# Altium PCB 3043-1-1532.PcbDoc (part 2 of 2)
Units mm, origin at the board's own origin, x right, y up, seen from the top; angles counter-clockwise.
Board outline 86 x 85.71 mm, 4 copper layers (Top Layer, Mid-Layer 1, Mid-Layer 2, Bottom Layer); 181 components, 109 nets, 536 pads, 310 vias.
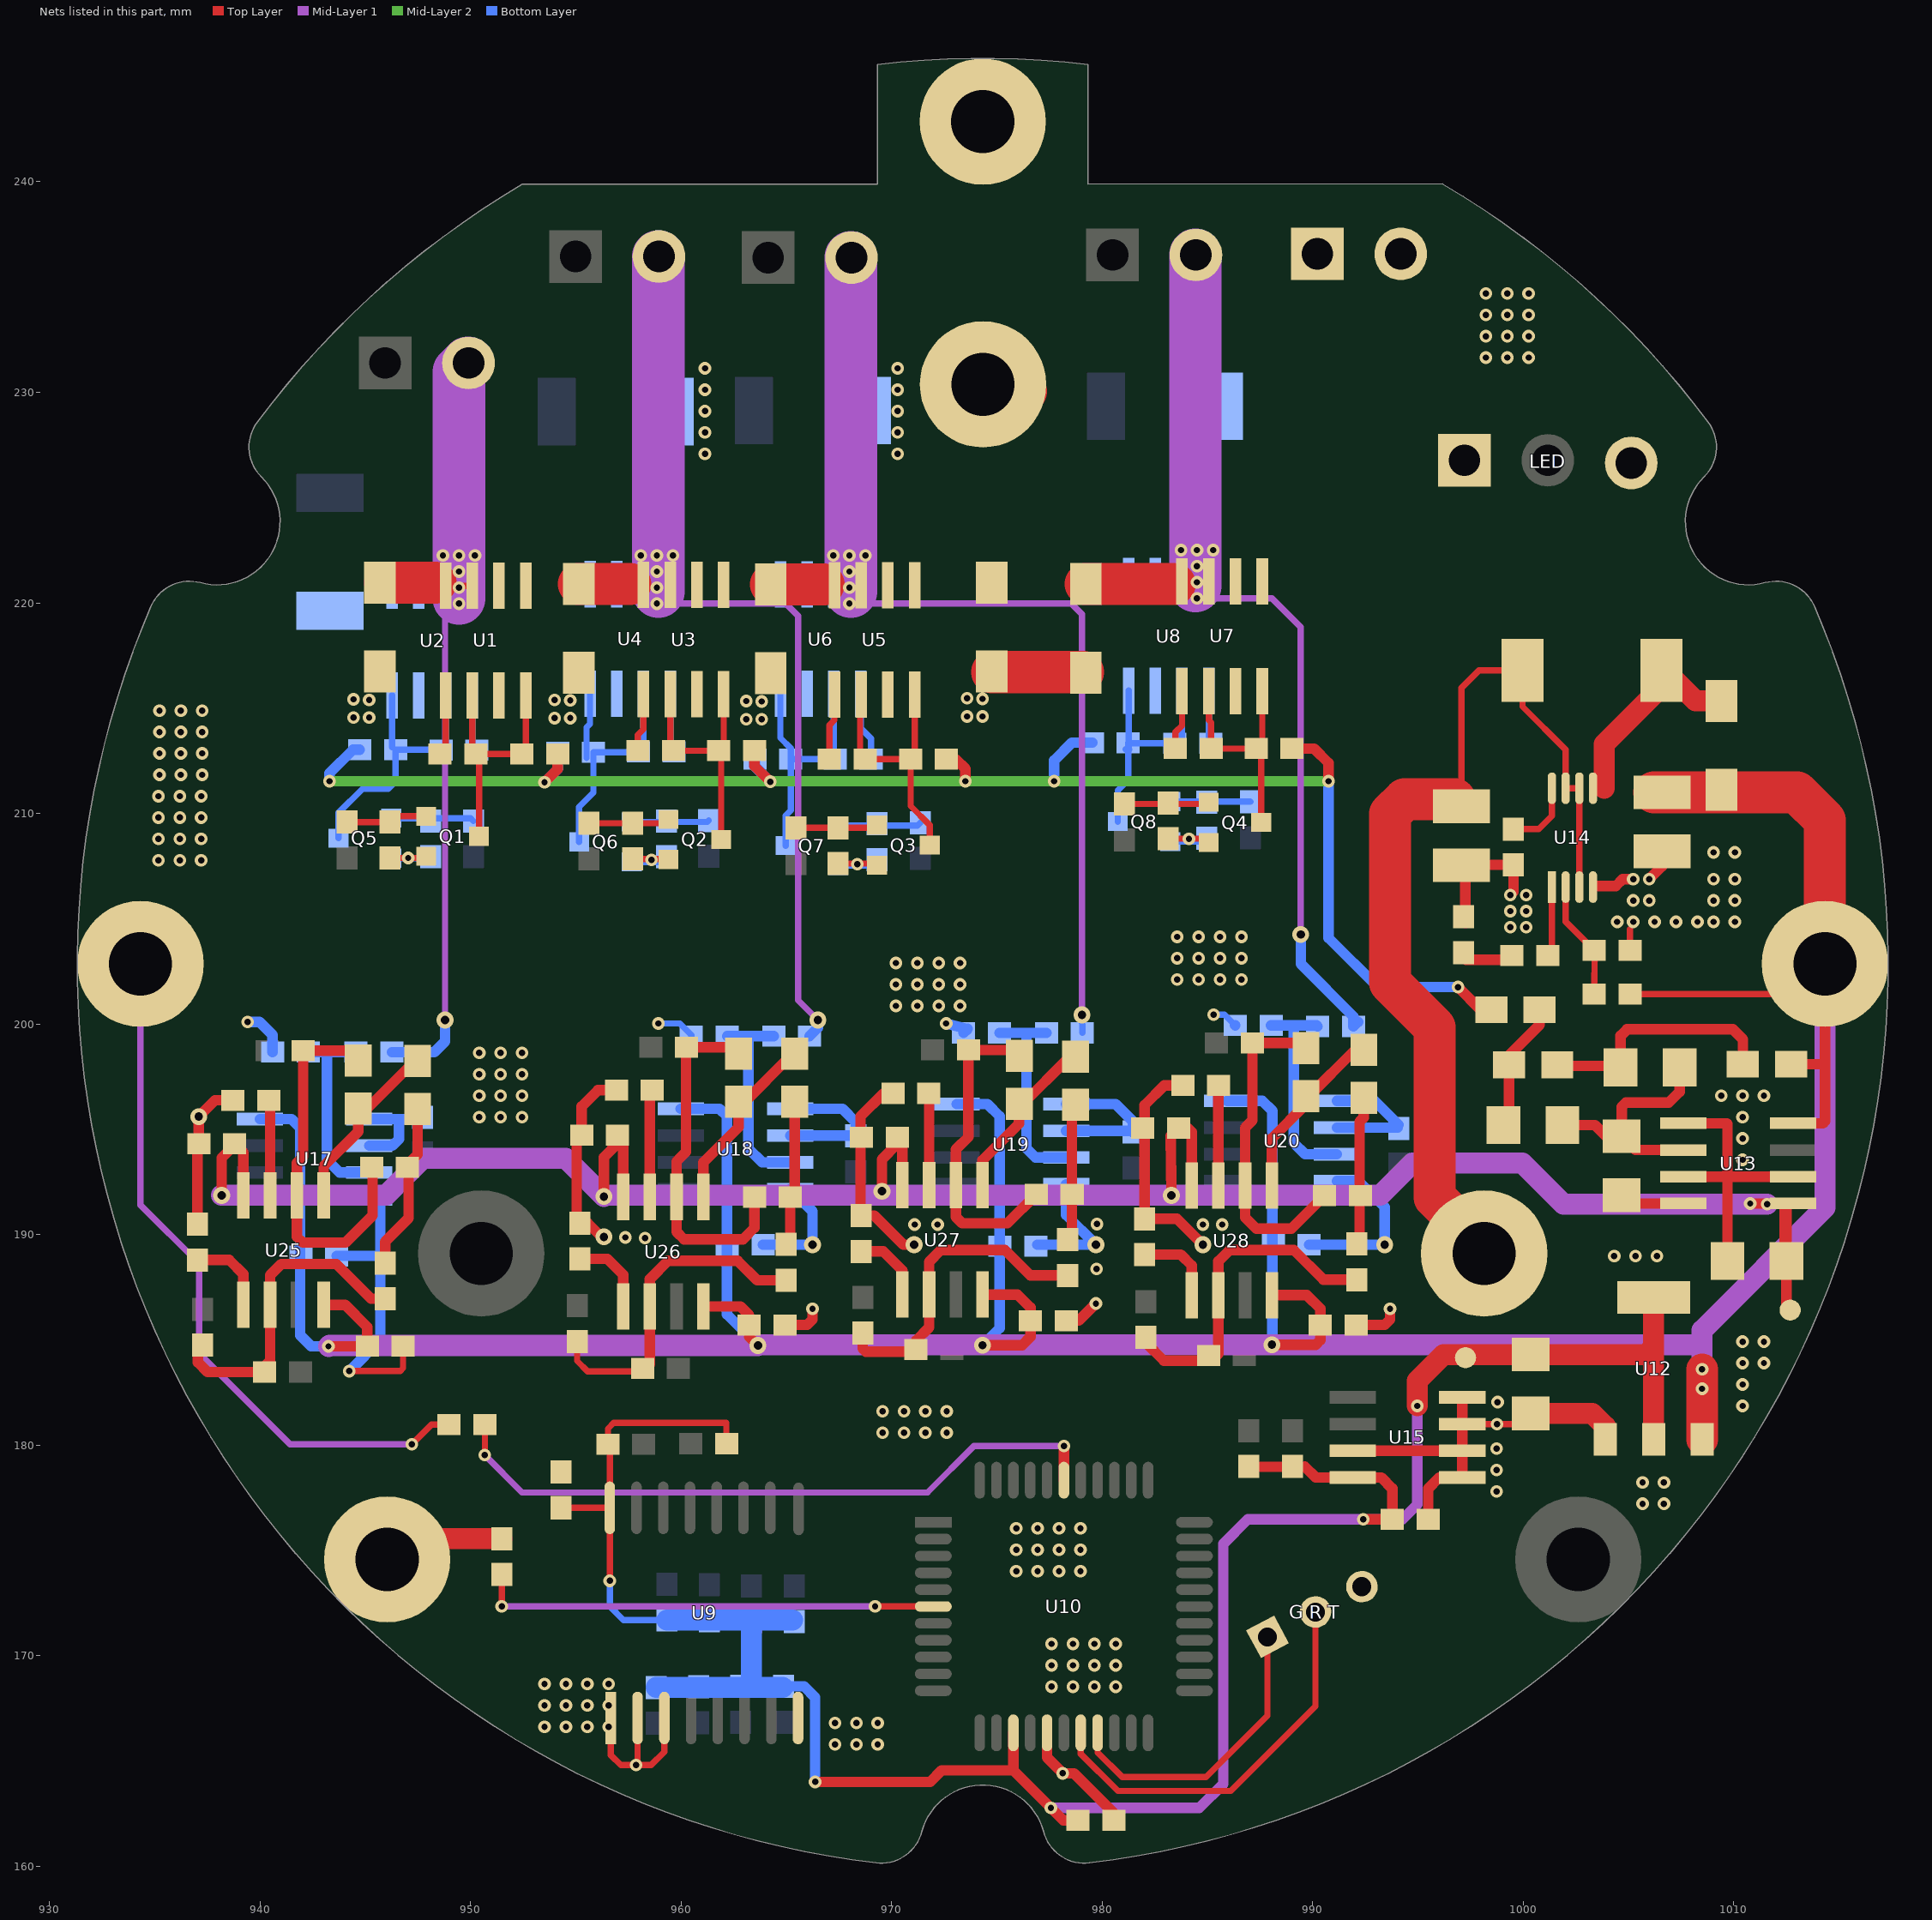
[diagram p4: the nets of this part, all layers, seen from the top]

## Via types
v1: diameter 0.6, hole 0.3, Top Layer to Bottom Layer, 288 vias
v2: diameter 0.8, hole 0.4, Top Layer to Bottom Layer, 22 vias

## Nets (pads, with @x,y where several pads share a name; then routed paths per layer and width w, separated by ;. In a path a pad name is that pad's centre, name@x,y a point inside that pad or via, vN(x,y) a via of type N, cw(c..) or ccw(c..) an arc to the next point about the centre after c; other vN are vias at no path point) (continued)
GND: "G R T.3" +SOLAR-.1 C1.2 C2.2 C4.2 C5.2 C6.2 C7.2 C9.2 C10.2 C11.2 C12.2 C13.2 C14.2 C15.2 C16.2 C17.2 C18.2 C19.2 C20.2 C21.2 C22.2 GND.1 LED.3 Q1.2 Q2.2 Q3.2 Q4.2 Q5.2 Q6.2 Q7.2 Q8.2 R3.2 R4.2 R5.2 R6.2 R15.2 R28.1 R29.1 R34.1 R35.1 R37.2 R49.2 R50.2 R51.2 R52.2 R63.2 R64.2 R65.2 R66.2 R78.2 R87.2 R88.2 R89.2 R90.2 R91.2 R92.2 R93.2 U9.1 U9.2 U9.3 U9.8 U10.16 U12.1 U13.1 U13.3 U13.6 U14.4 U15.1 U15.2 U15.3 U15.4 U15.7 U17.4 U18.4 U19.4 U20.4 | length 157.5
  Top Layer w0.3: v1(944.245,183.515) 946.658,183.515 946.797,183.654 C10.2@946.797,184.709 ; R78.2@946.175,207.887 Q1.2@947.819,207.887 ; U9.1@956.666,167.04 956.666,165.278 957.139,164.805 958.58,164.805 959.206,165.43 U9.3@959.206,167.04 ; R87.2@957.707,207.836 Q2.2@959.38,207.836 ; v1@957.936,164.805 U9.2@957.936,167.04 ; R88.2@967.461,207.62 Q3.2@969.235,207.62 ; R89.2@983.132,208.802 984.881,208.802 Q4.2@985.057,208.625 ; U15.3@997.102,181 999.852,181 C2.2@1000.354,181.502 ; R15.2@1005.064,203.505 1005.064,204.507
  Top Layer w0.5: R51.2@937.031,190.493 C12.2@937.031,194.012 ; C12.2@937.096,194.32 v2(937.096,195.603) 937.87,196.377 R49.2@938.721,196.377 ; v2(956.335,189.89) 956.335,189.773 955.562,190.547 955.04,190.547 955.04,194.484 C13.2@955.282,194.726 955.282,196.086 956.056,196.86 R50.2@956.933,196.86 ; C11.2@964.932,185.709 965.987,185.709 966.241,185.963 v1(966.241,186.471) ; R65.2@968.527,190.789 968.527,195.615 969.62,196.707 R63.2@970.065,196.707 ; R65.2@968.553,190.902 969.176,190.902 970.559,189.519 v2(971.067,189.519) ; U10.16@977.382,166.336 977.382,165.161 v1(978.129,164.414) 978.662,164.414 980.553,162.523 C18.2@980.553,162.179 ; C15.2@978.293,185.912 978.891,185.912 v1(979.703,186.725) ; R64.2@983.832,197.088 982.955,197.088 982.015,196.148 R66.2@982.015,190.75 983.552,190.75 v2(984.783,189.519) ; U15.7@991.902,179.73 U15.2@997.102,179.73 ; C14.2@992.06,185.709 993.419,185.709 993.673,185.963 v1(993.673,186.471) ; C9.2@995.479,176.479 995.479,177.939 996.001,178.46 U15.1@997.102,178.46 U15.4@997.102,182.27 ; C5.2@997.084,207.557 C7.2@999.531,207.557 v1@999.531,206.273 ; R37.2@997.245,204.787 C5.2@997.245,207.363 ; U14.4@1003.503,206.553 1004.392,206.553 1004.722,206.883 v1(1005.221,206.883) ; v1(1005.983,206.883) 1006.592,207.493 C6.2@1006.592,208.201 ; U13.3@1007.609,192.745 U13.6@1012.809,192.745 ; U13.1@1007.609,195.285 1009.666,195.285 1009.695,195.256 C4.2@1009.695,188.747
  Top Layer w1: C2.2@1000.354,181.381 C2.2@1000.354,181.502 1003.281,181.502 1003.892,180.891 U12.1@1003.892,180.267
  Bottom Layer w0.3: Q5.2@946.232,207.876 948.044,207.876 R90.2@948.106,207.938 ; Q6.2@957.662,207.698 959.068,207.698 R91.2@959.307,207.938 ; v1(958.926,200.025) 959.942,200.025 960.489,199.478 R29.1@960.489,199.425 ; Q7.2@967.466,207.521 969.024,207.521 R92.2@969.315,207.811 ; Q8.2@983.239,208.664 984.798,208.664 R93.2@984.961,208.827 ; v1(985.291,200.441) 985.813,200.441 R35.1@986.321,199.933
  Bottom Layer w0.5: v1(939.419,200.101) 939.978,200.101 940.601,199.478 R28.1@940.601,198.663 ; C19.2@943.647,188.986 945.718,188.986 ; v1(944.245,183.515) 945.718,184.988 U17.4@945.718,191.689 ; C20.2@963.891,189.519 v2(966.241,189.519) 966.241,191.103 U18.4@965.184,192.161 ; v1(972.591,200.025) 973.607,199.767 R34.1@973.418,199.577 ; C21.2@976.921,189.519 v2(979.703,189.519) 978.29,190.932 U19.4@978.29,192.389 ; R35.1@986.307,199.947 R35.1@986.321,199.933 ; C22.2@989.824,189.519 v2(993.419,189.519) 993.419,191.297 992.175,192.542 U20.4@991.143,192.542
  other v1: 957.859,164.805 967.308,165.786 968.324,165.786 969.34,165.786 953.516,166.624 954.532,166.624 955.548,166.624 956.564,166.624 967.308,166.802 968.324,166.802 969.34,166.802 953.516,167.64 954.532,167.64 955.548,167.64 956.564,167.64 977.595,168.529 978.611,168.529 979.627,168.529 980.643,168.529 953.516,168.656 954.532,168.656 955.548,168.656 956.564,168.656 977.595,169.545 978.611,169.545 979.627,169.545 980.643,169.545 977.595,170.561 978.611,170.561 979.627,170.561 980.643,170.561 975.919,174.015 976.935,174.015 977.951,174.015 978.967,174.015 975.919,175.031 976.935,175.031 977.951,175.031 978.967,175.031 975.919,176.047 976.935,176.047 977.951,176.047 978.967,176.047 1005.662,177.216 1006.678,177.216 998.728,177.8 1005.662,178.232 1006.678,178.232 998.728,178.816 998.728,179.832 969.569,180.594 970.585,180.594 971.601,180.594 972.617,180.594 998.753,181 969.569,181.61 970.585,181.61 971.601,181.61 972.617,181.61 1010.412,181.864 998.779,182.042 1010.412,182.88 1010.412,183.896 1011.428,183.896 1010.412,184.912 1011.428,184.912 979.729,188.366 1004.316,188.976 1005.332,188.976 1006.348,188.976 958.291,189.84 957.351,189.865 971.093,190.475 972.185,190.475 984.783,190.475 985.698,190.475 979.754,190.5 1010.412,193.548 1010.412,194.564 950.417,195.58 951.433,195.58 952.449,195.58 1010.412,195.58 950.417,196.596 951.433,196.596 952.449,196.596 1009.396,196.596 1010.412,196.596 1011.428,196.596 950.417,197.612 951.433,197.612 952.449,197.612 950.417,198.628 951.433,198.628 952.449,198.628 970.204,200.863 971.22,200.863 972.236,200.863 973.252,200.863 970.204,201.879 971.22,201.879 972.236,201.879 973.252,201.879 983.564,202.108 984.58,202.108 985.596,202.108 986.612,202.108 970.204,202.895 971.22,202.895 972.236,202.895 973.252,202.895 983.564,203.124 984.58,203.124 985.596,203.124 986.612,203.124 983.564,204.14 984.58,204.14 985.596,204.14 986.612,204.14 999.379,204.597 1000.141,204.597 1004.459,204.851 1005.221,204.851 1006.237,204.851 1007.253,204.851 1008.269,204.851 1009.031,204.851 1010.047,204.851 999.379,205.359 1000.141,205.359 1005.221,205.867 1005.983,205.867 1009.031,205.867 1010.047,205.867 999.379,206.121 1000.141,206.121 1009.031,206.883 1010.047,206.883 968.375,207.594 935.177,207.772 936.193,207.772 937.209,207.772 958.596,207.797 947.039,207.887 1009.031,208.153 1010.047,208.153 935.177,208.788 936.193,208.788 937.209,208.788 984.123,208.788 935.177,209.804 936.193,209.804 937.209,209.804 935.177,210.82 936.193,210.82 937.209,210.82 935.228,211.836 936.244,211.836 937.26,211.836 935.228,212.852 936.244,212.852 937.26,212.852 935.228,213.868 936.244,213.868 937.26,213.868 935.228,214.884 936.244,214.884 937.26,214.884 961.136,227.076 970.28,227.076 961.136,228.092 970.28,228.092 961.136,229.108 970.28,229.108 961.136,230.124 970.28,230.124 961.136,231.14 970.28,231.14 998.22,231.648 999.236,231.648 1000.252,231.648 998.22,232.664 999.236,232.664 1000.252,232.664 998.22,233.68 999.236,233.68 1000.252,233.68 998.22,234.696 999.236,234.696 1000.252,234.696
MCU_RXD: "G R T.2" U10.18 | length 19
  Top Layer w0.3: U10.18@978.982,166.336 978.982,165.339 980.745,163.576 986.104,163.576 990.126,167.598 990.126,172.074
MCU_RXD2_2: R69.1 U10.39 | length 32.2
  Top Layer w0.3: v1@950.683,179.539 R69.1@950.683,180.975
  Top Layer w0.5: U10.39@978.182,178.336 v1(978.182,179.959)
  Mid-Layer 1 w0.3: v1(950.671,179.527) 952.449,177.749 971.702,177.749 973.912,179.959 v1(978.182,179.959)
MCU_TXD: "G R T.1" U10.19 | length 14.4
  Top Layer w0.3: U10.19@979.782,166.336 979.782,165.403 980.948,164.236 984.936,164.236 987.849,167.15 987.849,170.893
MCU_TXD2_2: R68.1 U10.6 | length 22
  Top Layer w0.3: v1(951.484,172.339) R68.1@951.484,173.851 ; v1(969.213,172.339) U10.6@971.982,172.336
  Mid-Layer 1 w0.3: v1(951.484,172.339) v1(969.213,172.339)
NetC3_1: C3.1 U13.4 | length 3.1
  Top Layer w0.5: C3.1@1004.672,191.872 1004.875,191.872 1005.272,191.475 U13.4@1007.609,191.475
NetC3_2: C3.2 C23.2 C24.2 U13.2 | length 11.8
  Top Layer w0.5: C24.2@1001.858,195.199 1003.402,195.199 1003.929,194.672 C3.2@1004.672,194.672 ; C23.2@1007.421,197.942 1007.421,196.78 1006.907,196.266 1004.875,196.266 1004.672,196.063 C3.2@1004.672,194.672 ; U13.2@1007.609,194.015 1005.328,194.015 C3.2@1004.672,194.672
NetC7_1: C7.1 U14.8 | length 3.4
  Top Layer w0.3: C7.1@999.531,209.257 1000.737,209.257 1001.36,209.88 U14.8@1001.36,211.197
NetC8_1: C8.1 U14.1 | length 3.4
  Top Layer w0.3: C8.1@1001.36,203.112 U14.1@1001.36,206.502
NetC8_2: C8.2 R37.1 | length 2.3
  Top Layer w0.5: R37.1@997.284,203.048 C8.2@999.596,203.048
NetC23_1: C23.1 D1.2 D2.1 | length 11.8
  Top Layer w0.5: D2.1@1001.68,198.007 1004.556,198.007 C23.1@1004.621,197.942 1004.621,199.441 1004.926,199.746 1009.955,199.746 1010.426,199.274 D1.2@1010.426,198.089
NetD3_1: D3.1 L2.2 U14.5 | length 10.3
  Top Layer w1: 1003.833,211.201 1003.833,213.284 1006.567,216.017 L2.2@1006.567,216.789 ; L2.2@1006.5,217.018 1008.177,215.341 D3.1@1009.412,215.341
NetD7_1: D7.1 D9.2 U25.1 | length 9
  Top Layer w0.5: U25.1@943.026,191.862 943.026,193.253 944.672,194.899 D7.1@944.672,195.982 945.095,195.982 947.355,198.243 D9.2@947.491,198.243 ; D9.2@947.268,197.898 D9.2@947.268,198.353
NetD7_2: D7.2 R43.2 R45.1 U25.2 | length 18.2
  Top Layer w0.5: D7.2@944.651,198.378 944.293,198.737 R45.1@942.047,198.737 942.047,193.694 941.756,193.403 941.756,189.897 942.035,189.618 944.067,189.618 945.351,190.902 R43.2@945.351,193.142
NetD8_1: D8.1 D10.2 U26.1 | length 8.6
  Top Layer w0.5: U26.1@961.06,191.789 961.06,193.433 962.731,195.104 D8.1@962.731,196.312 ; D8.1@962.88,196.163 D10.2@965.276,198.559
NetD8_2: D8.2 R44.2 R46.1 U26.2 | length 17.2
  Top Layer w0.5: R46.1@960.233,198.993 960.233,193.925 959.79,193.481 959.79,190.129 960.145,189.773 962.939,189.773 963.486,190.32 R44.2@963.486,191.78 ; R46.1@960.259,198.892 D8.2@962.914,198.892
NetD9_1: D9.1 R43.1 R47.2 | length 7.9
  Top Layer w0.5: R47.2@945.947,188.653 945.947,189.662 947.064,190.779 947.064,193.377 947.491,193.804 D9.1@947.491,195.957
NetD10_1: D10.1 R44.1 R48.2 | length 6.9
  Top Layer w0.5: R48.2@965.186,189.544 R44.1@965.186,191.78 965.398,191.991 D10.1@965.398,196.312
NetD11_1: D11.1 D13.2 U27.1 | length 7.9
  Top Layer w0.5: U27.1@974.319,192.348 974.319,193.535 976.046,195.262 976.046,196.021 D13.2@978.56,198.536
NetD11_2: D11.2 R57.2 R59.1 U27.2 | length 15.1
  Top Layer w0.5: D11.2@976.046,198.762 973.647,198.762 R59.1@973.645,198.765 973.645,194.636 973.049,194.04 973.049,190.84 973.353,190.535 975.501,190.535 R57.2@976.872,191.907
NetD12_1: D12.1 D14.2 U28.1 | length 8.5
  Top Layer w0.5: U28.1@988.06,192.322 988.06,194.574 989.68,196.194 D12.1@989.68,196.566 ; D12.1@989.799,196.566 992.008,198.776 D14.2@992.424,198.776 D14.2@992.424,198.683
NetD12_2: D12.2 R58.2 R60.1 U28.2 | length 15.7
  Top Layer w0.5: D12.2@989.66,198.914 989.48,199.095 R60.1@987.132,199.095 987.132,195.424 986.79,195.082 986.79,190.814 987.323,190.281 988.988,190.281 R58.2@990.563,191.856
NetD13_1: D13.1 R57.1 R61.2 | length 6.5
  Top Layer w0.5: R61.2@978.56,189.759 978.56,195.987 D13.1@978.733,196.16
NetD14_1: D14.1 R58.1 R62.2 | length 7
  Top Layer w0.5: R62.2@992.226,189.595 992.226,195.364 992.424,195.562 D14.1@992.424,196.49
NetD19_2: D19.2 D20.2 D21.2 D22.2 D23.2 VMNG_IN.1 | length 10.1
  Top Layer w2: VMNG_IN.1@972.82,231.124 975.284,231.124 VMNG_IN.1@976.375,230.033 ; VMNG_IN.1@972.998,229.108 VMNG_IN.1@974.268,230.378 ; D23.2@974.776,216.713 D22.2@979.094,216.713
  other v1: 963.092,214.478 963.828,214.478 953.999,214.528 954.735,214.528 944.448,214.554 945.185,214.554 973.582,214.605 974.319,214.605 963.828,215.316 963.092,215.341 954.735,215.367 945.185,215.392 953.999,215.392 944.448,215.417 974.319,215.443 973.582,215.468
NetQ1_1: Q1.1 R70.1 R78.1 | length 3.9
  Top Layer w0.3: R70.1@944.143,209.587 R78.1@946.175,209.587 946.453,209.865 Q1.1@947.897,209.865
NetQ2_1: Q2.1 R71.1 R87.1 | length 3.6
  Top Layer w0.3: R71.1@955.624,209.536 Q2.1@959.227,209.536
NetQ3_1: Q3.1 R72.1 R88.1 | length 3.7
  Top Layer w0.3: R72.1@965.454,209.32 Q3.1@969.184,209.32
NetQ4_1: Q4.1 R73.1 R89.1 | length 3.9
  Top Layer w0.3: R73.1@981.05,210.451 Q4.1@984.983,210.451
NetQ5_1: Q5.1 R74.1 R90.1 | length 4
  Bottom Layer w0.3: Q5.1@946.232,209.776 950,209.776 R74.1@950.138,209.638
NetQ6_1: Q6.1 R75.1 R91.1 | length 3.7
  Bottom Layer w0.3: Q6.1@957.662,209.598 961.249,209.598 R75.1@961.314,209.663
NetQ7_1: Q7.1 R76.1 R92.1 | length 4
  Bottom Layer w0.3: Q7.1@967.466,209.421 971.231,209.421 R76.1@971.372,209.562
NetQ8_1: Q8.1 R77.1 R93.1 | length 3.8
  Bottom Layer w0.3: Q8.1@983.239,210.564 987.033,210.564 R77.1@987.044,210.552
NetR1_1: R1.1 U1.1 U1.3 | length 2.9
  Top Layer w0.3: R1.1@948.551,212.827 948.817,213.092 U1.1@948.817,215.611
NetR2_2: R2.2 U2.1 U2.3 | length 2.6
  Bottom Layer w0.3: R2.2@950.087,213.055 U2.1@950.087,215.611
NetR7_2: R7.2 U3.1 U3.3 | length 2.8
  Top Layer w0.3: R7.2@957.949,212.979 957.949,213.729 958.215,213.995 U3.1@958.215,215.662
NetR10_2: R10.2 U4.1 U4.3 | length 2.8
  Bottom Layer w0.3: U4.1@959.485,215.688 959.485,213.118 R10.2@959.675,212.928
NetR11_2: R11.2 U5.1 U5.3 | length 3.2
  Top Layer w0.3: R11.2@967.042,212.573 967.042,214.186 967.283,214.427 U5.1@967.283,215.637
NetR12_2: R12.2 U6.1 U6.3 | length 3.3
  Bottom Layer w0.3: U6.1@968.527,215.678 968.527,214.046 969.022,213.551 R12.2@969.022,212.573
NetR13_2: R13.2 U7.1 U7.3 | length 2.9
  Top Layer w0.3: R13.2@983.476,213.081 983.476,213.856 983.793,214.173 U7.1@983.793,215.815
NetR14_2: R14.2 R15.1 U14.2 | length 5.7
  Top Layer w0.3: U14.2@1002.01,206.502 1002.01,204.859 1003.39,203.479 R14.2@1003.364,201.422 R14.2@1003.441,201.473
NetR16_2: R16.2 U8.1 U8.3 | length 2.8
  Bottom Layer w0.3: R16.2@985.063,213.069 U8.1@985.063,215.83
NetR24_1: R24.1 R28.2 U17.3 | length 9.6
  Bottom Layer w0.5: R28.2@942.301,198.663 R24.1@944.563,198.663 ; 943.178,198.663 943.178,193.558 943.786,192.949 U17.3@945.194,192.949
NetR25_1: R25.1 R29.2 U18.3 | length 9.8
  Bottom Layer w0.5: R29.2@962.189,199.425 R25.1@964.401,199.425 ; 963.193,199.425 963.193,194.091 963.854,193.431 U18.3@965.184,193.431
NetR26_1: R26.1 U17.1 U17.2 | length 4.9
  Bottom Layer w0.5: U17.2@945.194,194.219 946.288,194.219 946.607,194.539 946.607,195.489 ; U17.1@945.194,195.489 R26.1@947.596,195.489
NetR27_1: R27.1 U18.1 U18.2 | length 7.1
  Bottom Layer w0.5: U18.2@965.184,194.701 R27.1@968.285,194.701 ; U18.1@965.184,195.971 967.664,195.971 968.299,195.336 R27.1@968.299,194.687
NetR30_1: R30.1 R34.2 U19.3 | length 9.8
  Bottom Layer w0.5: R34.2@975.118,199.577 R30.1@977.355,199.577 ; 976.401,199.577 976.401,194.091 976.833,193.659 U19.3@978.29,193.659
NetR31_1: R31.1 R35.2 U20.3 | length 10.1
  Bottom Layer w0.5: R35.2@988.021,199.933 990.182,199.933 R31.1@990.233,199.882 ; 989.101,199.933 989.101,194.345 989.635,193.812 U20.3@991.143,193.812
NetR32_1: R32.1 U19.1 U19.2 | length 7.2
  Bottom Layer w0.5: U19.2@978.29,194.929 981.392,194.929 R32.1@981.456,194.865 981.456,195.386 980.643,196.199 U19.1@978.29,196.199
NetR33_1: R33.1 U20.1 U20.2 | length 6.3
  Bottom Layer w0.5: U20.2@991.143,195.082 R33.1@994.041,195.082 ; U20.1@991.143,196.352 992.937,196.352 R33.1@994.08,195.209
NetR39_1: R39.1 R40.2 R47.1 U25.6 | length 15.3
  Top Layer w0.5: R39.1@937.057,184.729 937.057,183.928 937.514,183.471 R40.2@940.22,183.471 ; R40.2@940.003,183.522 940.486,184.005 940.486,188.069 941.019,188.602 943.628,188.602 945.278,186.953 R47.1@945.947,186.953
NetR41_1: R41.1 R42.2 R48.1 U26.6 | length 16.4
  Top Layer w0.3: R41.1@955.065,184.926 955.065,183.998 955.564,183.499 R42.2@958.178,183.499
  Top Layer w0.5: R42.2@957.986,183.499 958.178,183.499 958.52,183.841 958.52,187.893 959.383,188.757 962.685,188.757 963.612,187.831 R48.1@965.2,187.831
NetR49_1: R49.1 U25.3 | length 4.5
  Top Layer w0.5: U25.3@940.486,191.862 R49.1@940.486,196.313
NetR50_1: R50.1 U26.3 | length 5
  Top Layer w0.5: U26.3@958.52,191.789 R50.1@958.52,196.746
NetR51_1: R51.1 U25.5 | length 3.9
  Top Layer w0.5: R51.1@937.031,188.793 938.542,188.793 939.216,188.119 U25.5@939.216,186.662
NetR52_1: R52.1 U26.5 | length 4
  Top Layer w0.5: R52.1@955.04,188.847 956.5,188.847 957.25,188.097 U26.5@957.25,186.589
NetR53_1: R53.1 R54.2 R61.1 U27.6 | length 15.3
  Top Layer w0.5: R53.1@968.629,185.316 968.629,184.591 968.781,184.439 R54.2@971.157,184.439 ; R54.2@971.157,184.541 971.157,184.969 971.779,185.591 971.779,188.706 972.337,189.265 975.385,189.265 976.591,188.059 R61.1@978.56,188.059
NetR55_1: R55.1 R56.2 R62.1 U28.6 | length 16.2
  Top Layer w0.5: R55.1@982.066,185.113 982.066,184.871 982.929,184.007 985.178,184.007 985.52,184.349 985.52,188.732 986.053,189.265 989.101,189.265 990.51,187.856 R62.1@992.302,187.856
NetR63_1: R63.1 U27.3 | length 4.3
  Top Layer w0.5: U27.3@971.779,192.348 R63.1@971.779,196.694
NetR64_1: R64.1 U28.3 | length 4.8
  Top Layer w0.5: U28.3@985.52,192.322 R64.1@985.52,197.076
NetR65_1: R65.1 U27.5 | length 3.5
  Top Layer w0.5: R65.1@968.553,189.202 969.606,189.202 970.509,188.3 U27.5@970.509,187.148
NetR66_1: R66.1 U28.5 | length 3.9
  Top Layer w0.5: R66.1@982.015,189.05 983.728,189.05 984.25,188.528 U28.5@984.25,187.122
RXD: R69.2 RxD.1 | length 33.7
  Top Layer w0.3: v1(947.217,180.035) 948.157,180.975 R69.2@948.983,180.975
  Mid-Layer 1 w0.3: RxD.1@934.326,202.856 934.326,191.402 937.108,188.62 937.108,184.353 941.426,180.035 v1(947.217,180.035)
S1_1: Q1.3 R1.2 R17.1 U1.2 U1.4 | length 11.9
  Top Layer w0.3: U1.2@950.087,215.611 950.087,213.194 950.404,212.877 Q1.3@950.404,208.921 ; R1.2@950.251,212.827 R17.1@952.437,212.827 952.627,213.016 U1.4@952.627,215.611
S1_2: Q2.3 R7.1 R18.1 U3.2 U3.4 | length 11.8
  Top Layer w0.3: U3.2@959.485,215.662 959.485,213.143 R7.1@959.649,212.979 R18.1@961.785,212.979 962.025,213.219 U3.4@962.025,215.662 ; Q2.3@961.903,208.763 R18.1@961.903,212.86
S1_3: Q3.3 R11.1 R19.1 U5.2 U5.4 | length 13.2
  Top Layer w0.3: U5.2@968.502,215.9 968.502,212.813 R11.1@968.742,212.573 R19.1@970.903,212.573 ; U5.4@971.093,215.637 971.093,212.762 R19.1@970.903,212.573 ; Q3.3@971.809,208.495 971.809,209.443 970.903,210.349 R19.1@970.903,212.573
S1_4: Q4.3 R13.1 R20.1 U7.2 U7.4 | length 11.4
  Top Layer w0.3: U7.2@985.063,215.815 985.063,214.427 985.176,214.313 R13.1@985.176,213.081 R20.1@987.388,213.081 ; Q4.3@987.557,209.575 987.557,212.911 R20.1@987.388,213.081 ; U7.4@987.603,215.815 987.603,213.296 R20.1@987.388,213.081
S2_1: Q5.3 R2.1 R21.1 U2.2 U2.4 | length 13.3
  Bottom Layer w0.3: Q5.3@943.732,208.826 943.732,210.027 944.88,211.176 946.099,211.176 946.441,211.518 R21.1@946.441,213.03 R2.1@948.577,213.03 ; R21.1@946.277,213.143 U2.4@946.277,215.611 ; R2.1@948.602,213.004 948.817,213.219 U2.2@948.817,215.611
S2_2: Q6.3 R10.1 R22.1 U4.2 U4.4 | length 12.6
  Bottom Layer w0.3: Q6.3@955.162,208.648 955.162,210.307 955.839,210.984 R22.1@955.839,212.903 R10.1@957.949,212.903 ; R22.1@955.511,212.635 955.511,214.085 955.675,214.249 U4.4@955.675,215.688 ; R10.1@957.975,212.928 958.215,213.169 U4.2@958.215,215.688
S2_3: Q7.3 R12.1 R23.1 U6.2 U6.4 | length 12.7
  Bottom Layer w0.3: U6.4@964.717,215.678 964.717,213.589 965.212,213.094 965.212,210.146 964.966,209.9 Q7.3@964.966,208.471 ; R23.1@965.212,212.573 R12.1@967.322,212.573 ; R12.1@967.257,212.637 U6.2@967.257,215.678
S2_4: Q8.3 R16.1 R36.1 U8.2 U8.4 | length 11.9
  Bottom Layer w0.3: Q8.3@980.739,209.614 980.739,211.094 981.239,211.594 R36.1@981.239,213.36 ; R36.1@981.112,213.055 R36.1@981.138,213.03 ; R36.1@981.253,213.094 U8.4@981.253,215.83 ; R36.1@981.265,213.335 R16.1@983.451,213.335 ; R36.1@981.292,213.016 R36.1@981.292,213.055 ; R16.1@983.324,213.03 983.793,213.499 U8.2@983.793,215.83
TXD: R68.2 TxD.1 | length 5.8
  Top Layer w1: TxD.1@946.042,174.572 947.021,175.551 R68.2@951.484,175.551
V_BT1: +B1-.2 D19.1 R24.2 U1.7 U1.8 U2.7 U2.8 | length 38.2
  Top Layer w0.3: v1(949.452,220.726) 949.537,220.811 U1.7@950.087,220.811
  Top Layer w2: D19.1@945.947,220.955 948.334,220.955
  Mid-Layer 1 w0.3: v2(948.792,200.187) 948.792,219.304 v1(949.452,219.964)
  Mid-Layer 1 w2.5: v1@949.452,220.218 949.452,230.962 +B1-.2@949.884,231.394
  Bottom Layer w0.5: R24.2@946.263,198.663 948.284,198.663 948.792,199.171 v2(948.792,200.187)
  other v1: 949.452,221.488 948.69,222.25 949.452,222.25 950.214,222.25
V_BT2: +B2-.2 D20.1 R25.2 U3.7 U3.8 U4.7 U4.8 | length 45.8
  Top Layer w2: D20.1@955.142,220.904 957.58,220.904
  Mid-Layer 1 w0.3: v1(958.85,219.964) 964.971,219.964 965.556,219.38 965.556,201.127 v2(966.495,200.187)
  Mid-Layer 1 w2.5: v1@958.926,220.548 +B2-.2@958.926,236.449
  Bottom Layer w0.5: R25.2@966.101,199.425 966.495,199.82 v2(966.495,200.187)
  other v1: 958.85,220.726 958.85,221.488 958.088,222.25 958.85,222.25 959.612,222.25
V_BT3: +B3-.2 D21.1 R30.2 U5.7 U5.8 U6.7 U6.8 | length 49.5
  Top Layer w2: D21.1@964.26,220.878 966.775,220.878
  Mid-Layer 1 w0.3: v1(967.994,219.964) 978.535,219.964 979.043,219.456 v2(979.043,200.431)
  Mid-Layer 1 w2.5: v1@968.07,220.548 +B3-.2@968.07,236.398
  Bottom Layer w0.3: v2(979.043,200.431) R30.2@979.055,199.577
  other v1: 967.994,220.726 967.994,221.488 967.232,222.25 967.994,222.25 968.756,222.25
V_BT4: +B4-.2 D22.1 R31.2 U7.7 U7.8 U8.7 U8.8 | length 45.7
  Top Layer w2: D22.1@979.221,220.904 983.437,220.904
  Mid-Layer 1 w0.3: v1(984.504,220.218) 988.06,220.218 989.432,218.846 v2(989.432,204.251)
  Mid-Layer 1 w2.5: v1@984.428,220.802 +B4-.2@984.428,236.525
  Bottom Layer w0.5: v2(989.432,204.251) 989.432,202.856 991.933,200.355 R31.2@991.933,199.882 R31.2@992.149,200.099
  other v1: 984.504,220.98 984.504,221.742 983.742,222.504 984.504,222.504 985.266,222.504
VCC_3V3: 3V3.1 C1.1 C2.1 C9.1 C18.1 R8.1 R9.1 R38.2 R67.2 R79.2 R80.2 R81.2 R82.2 R83.2 R84.2 R85.2 R86.2 U9.16 U10.14 U12.2 U15.8 | length 121.3
  Top Layer w0.3: C1.1@954.303,177.026 U9.16@956.611,177.026 ; v1(956.615,173.558) 956.615,179.957 R8.1@956.527,180.045 956.527,180.785 956.793,181.051 962.138,181.051 ; 962.152,181.051 R9.1@962.164,180.07
  Top Layer w0.5: v1(966.368,164.008) 971.829,164.008 972.373,164.551 975.782,164.551 ; U10.14@975.782,166.336 975.782,164.551 ; C18.1@978.853,162.179 978.154,162.179 975.782,164.551 ; R67.2@987.019,178.968 989.621,178.982 990.143,178.46 993.257,178.46 993.779,177.939 C9.1@993.779,176.479 v1(992.403,176.479)
  Top Layer w1: v1(994.969,181.864) 994.969,183.058 996.213,184.302 1005.84,184.302 1006.192,184.655 ; U12.2@1006.192,180.267 U12.2@1006.192,187.017
  Mid-Layer 1 w0.5: v1(977.562,162.771) 984.614,162.771 985.749,163.906 985.749,175.311 986.917,176.479 994.258,176.479 994.969,177.19 v1(994.969,181.864)
  Bottom Layer w0.3: v1(956.615,173.558) 956.615,172.339 957.262,171.692 R86.2@959.333,171.692
  Bottom Layer w0.5: R82.2@964.87,168.541 965.849,168.541 966.368,168.021 v1(966.368,164.008)
  Bottom Layer w1: R79.2@958.825,168.49 R82.2@964.819,168.49 ; R86.2@959.333,171.692 R83.2@965.302,171.692 ; 963.346,168.541 R84.2@963.346,171.616
VCC_5V: C6.1 C10.1 C11.1 C14.1 C15.1 C19.1 C20.1 C21.1 C22.1 D1.1 D3.2 R14.1 U12.3 U13.8 U17.8 U18.8 U19.8 U20.8 U25.8 U26.8 U27.8 U28.8 VCC5V.1 | length 203.1
  Top Layer w0.3: R14.1@1005.064,201.422 1012.892,201.422 VCC5V.1@1014.326,202.856
  Top Layer w0.5: U25.8@943.026,186.662 944.044,186.662 945.097,185.61 C10.1@945.097,184.709 ; v1(943.254,184.693) C10.1@944.979,184.693 ; U26.8@961.06,186.589 962.822,186.589 C11.1@963.232,186.178 ; C11.1@963.232,185.709 963.232,185.152 v2(963.651,184.734) ; v2(974.319,184.744) 976.198,184.744 976.593,185.138 976.593,186.534 975.979,187.148 U27.8@974.319,187.148 ; v2(988.06,184.769) 990.143,184.769 990.36,184.986 990.36,186.483 989.72,187.122 U28.8@988.06,187.122 ; D1.1@1012.712,198.089 1014.296,198.089 ; U13.8@1012.809,195.285 1014.232,195.285 1014.326,195.38 VCC5V.1@1014.326,203.073
  Top Layer w1.5: U12.3@1008.492,180.267 v1(1008.492,183.602)
  Top Layer w2: C6.1@1006.211,211.001 1013,211.001 1014.326,209.674 VCC5V.1@1014.326,203.073
  Mid-Layer 1 w1: v1(943.254,184.693) 943.296,184.734 v2(963.651,184.734) ; v2@963.651,184.769 1008.466,184.769 1008.482,184.785 ; 1008.482,182.27 1008.482,185.445 1014.326,191.29 VCC5V.1@1014.326,202.856
  Bottom Layer w0.5: U17.8@939.994,195.489 941.5,195.489 941.908,195.082 941.908,185.217 942.432,184.693 v1(943.254,184.693) ; U18.8@959.984,195.971 961.822,195.971 962.177,195.615 962.177,186.207 v2(963.651,184.734) ; U19.8@973.09,196.199 974.547,196.199 975.131,195.615 975.131,185.557 v2(974.319,184.744) ; U20.8@985.943,196.352 987.603,196.352 988.085,195.869 v2@988.085,184.972
  other v1: 1008.492,182.677
VCC_9V: C24.1 D2.2 D17.1 | length 6.2
  Top Layer w0.5: C24.1@999.058,195.199 999.326,195.467 999.326,198.515 1000.774,199.963 D17.1@1000.774,200.68
VCC_-5V: -5V.1 C4.1 C12.1 C13.1 C16.1 C17.1 U13.5 U25.4 U26.4 U27.4 U28.4 | length 108.5
  Top Layer w0.5: v2(938.181,191.862) 938.181,193.64 938.632,194.091 C12.1@938.632,194.345 ; C12.1@938.796,194.32 939.216,193.9 U25.4@939.216,191.862 ; v2(956.335,191.805) 956.335,193.676 956.982,194.323 C13.1@956.982,194.726 ; C13.1@957.097,194.853 957.25,194.701 U26.4@957.25,191.789 ; v2(969.543,192.059) 969.543,193.574 C17.1@970.266,194.297 ; C17.1@970.266,194.624 970.534,194.624 970.509,194.599 U27.4@970.509,192.348 ; v2(983.285,191.862) 983.259,194.689 C16.1@983.627,195.056 984.072,195.056 984.25,194.878 U28.4@984.25,192.322 ; v1(1010.777,191.475) U13.5@1012.809,191.475 ; C4.1@1012.419,189.595 U13.5@1012.419,191.322 ; U13.5@1012.52,191.424 1012.495,191.399 1012.495,186.588 -5V.1@1012.673,186.411
  Mid-Layer 1 w1: v2(938.181,191.862) 945.988,191.862 947.75,193.624 954.516,193.624 v2(956.335,191.805) ; v2@956.335,191.862 993.216,191.862 994.749,193.396 999.947,193.396 1001.903,191.44 v1(1011.58,191.44)
VCC_BAT: LED.1 U2.5 U2.6 U4.5 U4.6 U6.5 U6.6 U8.5 U8.6
VCC_CHARGE: +SOLAR-.2 D23.1 U1.5 U1.6 U3.5 U3.6 U5.5 U5.6 U7.5 U7.6
VCC_MNG: C5.1 L2.1 U14.3 U14.6 U14.7 VMNG_OUT.1 | length 46.4
  Top Layer w0.3: C5.1@997.067,210.34 997.067,215.967 997.89,216.789 L2.1@999.963,216.789 999.963,215.071 1002.01,213.024 U14.7@1002.01,211.197 U14.6@1002.66,211.197 U14.3@1002.66,206.502
  Top Layer w2: C5.1@996.747,210.668 994.359,210.668 993.673,209.982 993.673,201.955 995.782,199.847 995.782,191.77 VMNG_OUT.1@998.142,189.41
VCC_TH: D17.2 R17.2 R18.2 R19.2 R20.2 R21.2 R22.2 R23.2 R36.2 | length 80.5
  Top Layer w0.5: v1(953.516,211.48) 954.137,212.102 R17.2@954.137,212.827 ; R18.2@963.485,212.979 963.485,212.256 v1(964.235,211.506) ; R19.2@972.603,212.573 973.049,212.573 973.506,212.115 v1(973.506,211.531) ; R20.2@989.012,213.081 990.067,213.081 990.752,212.395 v1(990.752,211.531) ; v1(996.899,201.752) 997.971,200.68 D17.2@998.488,200.68
  Mid-Layer 2 w0.5: v1(943.305,211.531) v1(990.752,211.531) v1@990.778,211.557
  Bottom Layer w0.5: v1(943.305,211.531) 943.305,211.912 944.423,213.03 R21.2@944.741,213.03 ; v1(953.516,211.48) 954.139,212.104 R22.2@954.139,212.903 ; R23.2@963.512,212.573 963.512,212.229 v1(964.235,211.506) ; v1(977.722,211.531) 977.722,212.522 978.56,213.36 R36.2@979.539,213.36 ; v1(990.752,211.531) 990.752,204.089 993.089,201.752 v1(996.899,201.752)
pads on no net: U9.13 U10.3 U10.13 U10.15 U10.17 U10.20 U10.21 U10.22 U10.23 U10.24 U10.25 U10.26 U10.27 U10.28 U10.29 U10.30 U10.31 U10.32 U10.33 U10.36 U10.37 U10.38 U10.40 U10.41 U10.42 U10.43 U10.44 U13.7 U17.5 U17.6 U17.7 U18.5 U18.6 U18.7 U19.5 U19.6 U19.7 U20.5 U20.6 U20.7

## Polygon pours and split planes (outlines as drawn)
NetD3_1 on Top Layer (solid, remove dead copper): 1003.189,210.693 1003.189,213.741 1004.459,215.011 1004.459,220.091 1007.507,220.091 1007.507,215.265 1004.459,212.217 1004.459,210.693
NetD3_1 on Top Layer (solid, remove dead copper): 1004.713,213.487 1010.555,213.487 1010.555,220.091 1005.328,220.091 1005.328,213.487
GND on Top Layer (solid, remove dead copper): 1003.189,204.597 1003.189,208.915 1010.555,208.915 1010.555,204.851 1010.047,204.343 1003.697,204.343 1003.189,204.851
V_BT1 on Top Layer (solid, remove dead copper): 948.519,219.735 950.468,219.735 950.468,222.758 948.411,222.758 948.411,219.735
V_BT2 on Top Layer (solid, remove dead copper): 957.917,219.735 959.866,219.735 959.866,222.758 957.809,222.758 957.809,219.735
V_BT3 on Top Layer (solid, remove dead copper): 967.061,219.735 969.01,219.735 969.01,222.758 966.953,222.758 966.953,219.735
V_BT4 on Top Layer (solid, remove dead copper): 983.571,219.989 985.52,219.989 985.52,223.012 983.463,223.012 983.463,219.989
VCC_CHARGE on Top Layer (solid, remove dead copper): 951.23,219.964 988.822,219.964 988.822,221.742 996.188,229.108 996.188,238.252 992.378,238.252 992.378,232.918 985.012,225.552 951.23,225.552
NetR1_1 on Top Layer (solid, remove dead copper): 948.484,214.63 951.992,214.63 951.992,219.202 947.674,219.202 947.674,214.63
NetR7_2 on Top Layer (solid, remove dead copper): 957.675,214.63 961.39,214.63 961.39,219.202 956.818,219.202 956.818,214.63
NetR11_2 on Top Layer (solid, remove dead copper): 966.819,214.63 970.534,214.63 970.534,219.202 965.962,219.202 965.962,214.63
NetR13_2 on Top Layer (solid, remove dead copper): 983.329,214.884 987.044,214.884 987.044,219.456 982.472,219.456 982.472,214.884
NetD19_2 on Top Layer (solid, remove dead copper): 953.592,217.678 955.954,217.678 955.954,213.817 953.592,213.817
NetD19_2 on Top Layer (solid, remove dead copper): 944.042,217.703 946.404,217.703 946.404,213.843 944.042,213.843
NetD19_2 on Top Layer (solid, remove dead copper): 962.685,217.627 965.048,217.627 965.048,213.766 962.685,213.766
NetD19_2 on Top Layer (solid, remove dead copper): 973.176,217.754 975.538,217.754 975.538,213.893 973.176,213.893
VCC_MNG on Top Layer (solid, remove dead copper): 995.705,209.499 998.525,209.499 998.525,210.337 1000.582,210.337 1000.582,212.319 1001.624,212.319 1001.878,212.065 1001.878,210.642 1002.157,210.642 1002.157,212.065 1002.386,212.293 1002.386,213.385 1001.598,214.173 1001.598,220.116 995.578,220.116 995.578,209.474
GND on Top Layer (solid, remove dead copper): 929.919,245.999 1018.438,245.999 1018.438,159.537 930.834,159.537 930.834,245.643
NetD19_2 on Mid-Layer 2 (solid, remove dead copper): 944.016,215.875 971.753,215.875 971.753,232.969 976.63,232.969 976.63,213.589 943.915,213.589 943.915,215.9
GND on Mid-Layer 2 (solid, remove dead copper): 929.742,246.558 1018.438,246.558 1018.438,158.979 930.3,158.979 930.3,246.736
V_BT1 on Bottom Layer (solid, remove dead copper): 948.519,219.735 950.468,219.735 950.468,222.758 948.411,222.758 948.411,219.735
V_BT2 on Bottom Layer (solid, remove dead copper): 957.917,219.735 959.866,219.735 959.866,222.758 957.809,222.758 957.809,219.735
V_BT3 on Bottom Layer (solid, remove dead copper): 967.061,219.735 969.01,219.735 969.01,222.758 966.953,222.758 966.953,219.735
V_BT4 on Bottom Layer (solid, remove dead copper): 983.571,219.989 985.52,219.989 985.52,223.012 983.463,223.012 983.463,219.989
VCC_BAT on Bottom Layer (solid, remove dead copper): 945.896,219.964 998.982,219.964 998.982,228.854 994.664,228.854 991.108,225.49 945.896,225.49
NetR2_2 on Bottom Layer (solid, remove dead copper): 947.976,214.376 951.484,214.376 951.484,218.948 947.166,218.948 947.166,214.376
NetR10_2 on Bottom Layer (solid, remove dead copper): 957.374,214.63 960.882,214.63 960.882,219.202 956.564,219.202 956.564,214.63
NetR12_2 on Bottom Layer (solid, remove dead copper): 966.264,214.63 969.772,214.63 969.772,219.202 965.454,219.202 965.454,214.63
NetR16_2 on Bottom Layer (solid, remove dead copper): 982.774,214.63 986.282,214.63 986.282,219.202 981.964,219.202 981.964,214.63
GND on Bottom Layer (solid, remove dead copper): 930.478,246.38 1018.794,246.38 1018.794,159.156 930.097,159.156 930.097,245.821

## Keep-outs
Keep-Out Layer:
  lines w0.127: 952.449,239.878 969.326,239.895 969.326,245.564 cw(c974.326,202.856) 979.326,245.565 979.326,239.887 996.165,239.898 ; 952.461,239.882 ccw(c974.326,202.856) 939.881,228.595 ccw(c941.483,227.398) 940.071,225.981 cw(c937.953,223.856) 937.172,220.96 ccw(c936.651,219.029) 934.813,219.818 ccw(c974.326,202.856) 969.259,160.156 ccw(c969.494,162.142) 971.427,161.628 cw(c974.326,160.856) 977.226,161.628 ccw(c979.158,162.142) 979.394,160.156 ccw(c974.326,202.856) 1013.84,219.818 ccw(c1012.002,219.029) 1011.481,220.96 cw(c1010.7,223.856) 1008.582,225.981 ccw(c1007.17,227.398) 1008.772,228.595 ccw(c974.326,202.856) 996.165,239.898

## Silkscreen, mask and mechanical layers (free items; w line width, h text height)
Top Overlay:
  rectangle: 954.303,226.593 970.483,230.007
  text "PN:3043-1-1532" at 952.043,232.715 h1
  text "Rev:2.01" at 951.992,230.861 h1
  text "SN:" at 951.687,227.838 h1
Mechanical 1:
  circle w0.127: c974.326,230.356 r3
  circle w0.127: c998.142,189.106 r3
  circle w0.127: c950.511,189.106 r3
  circle w0.127: c946.042,174.572 r3
  circle w0.127: c1002.611,174.572 r3
  circle w0.127: c974.326,242.856 r3
  circle w0.127: c1014.326,202.856 r3
  circle w0.127: c934.326,202.856 r3